# Allegro board pow.brd
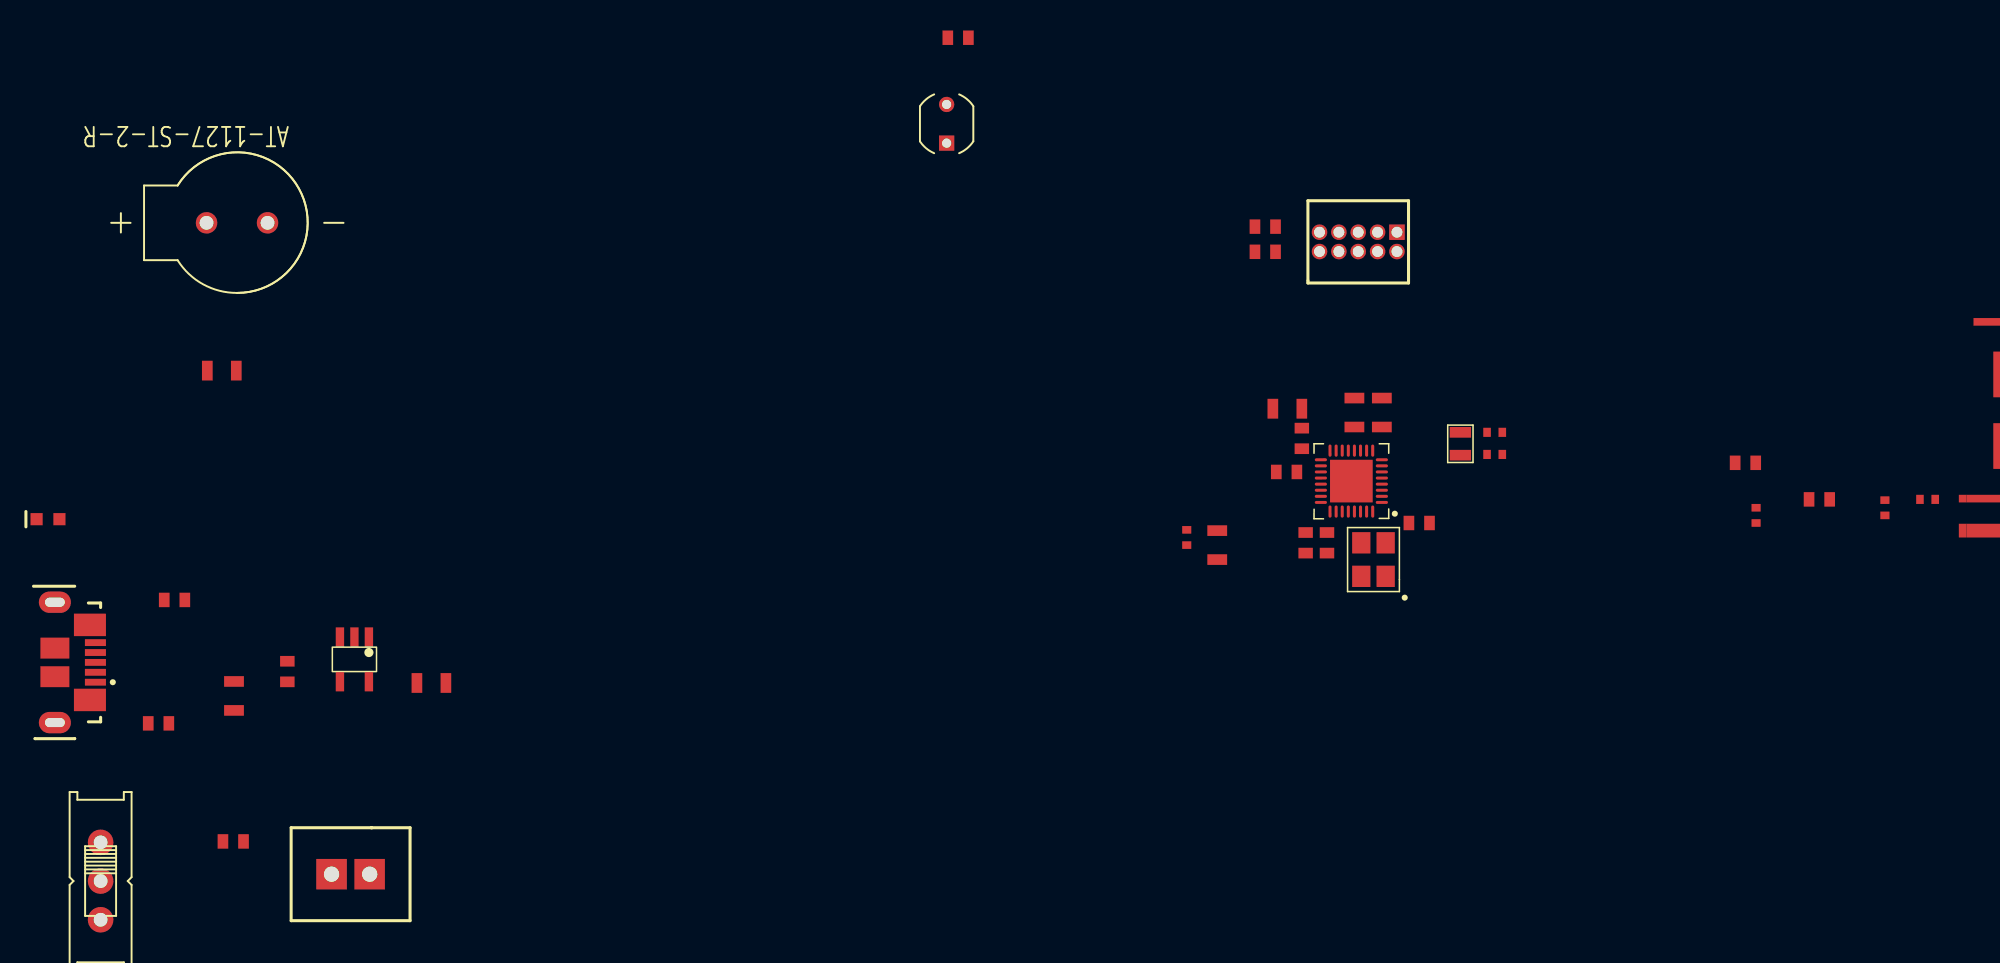
[diagram p0: board, top side]
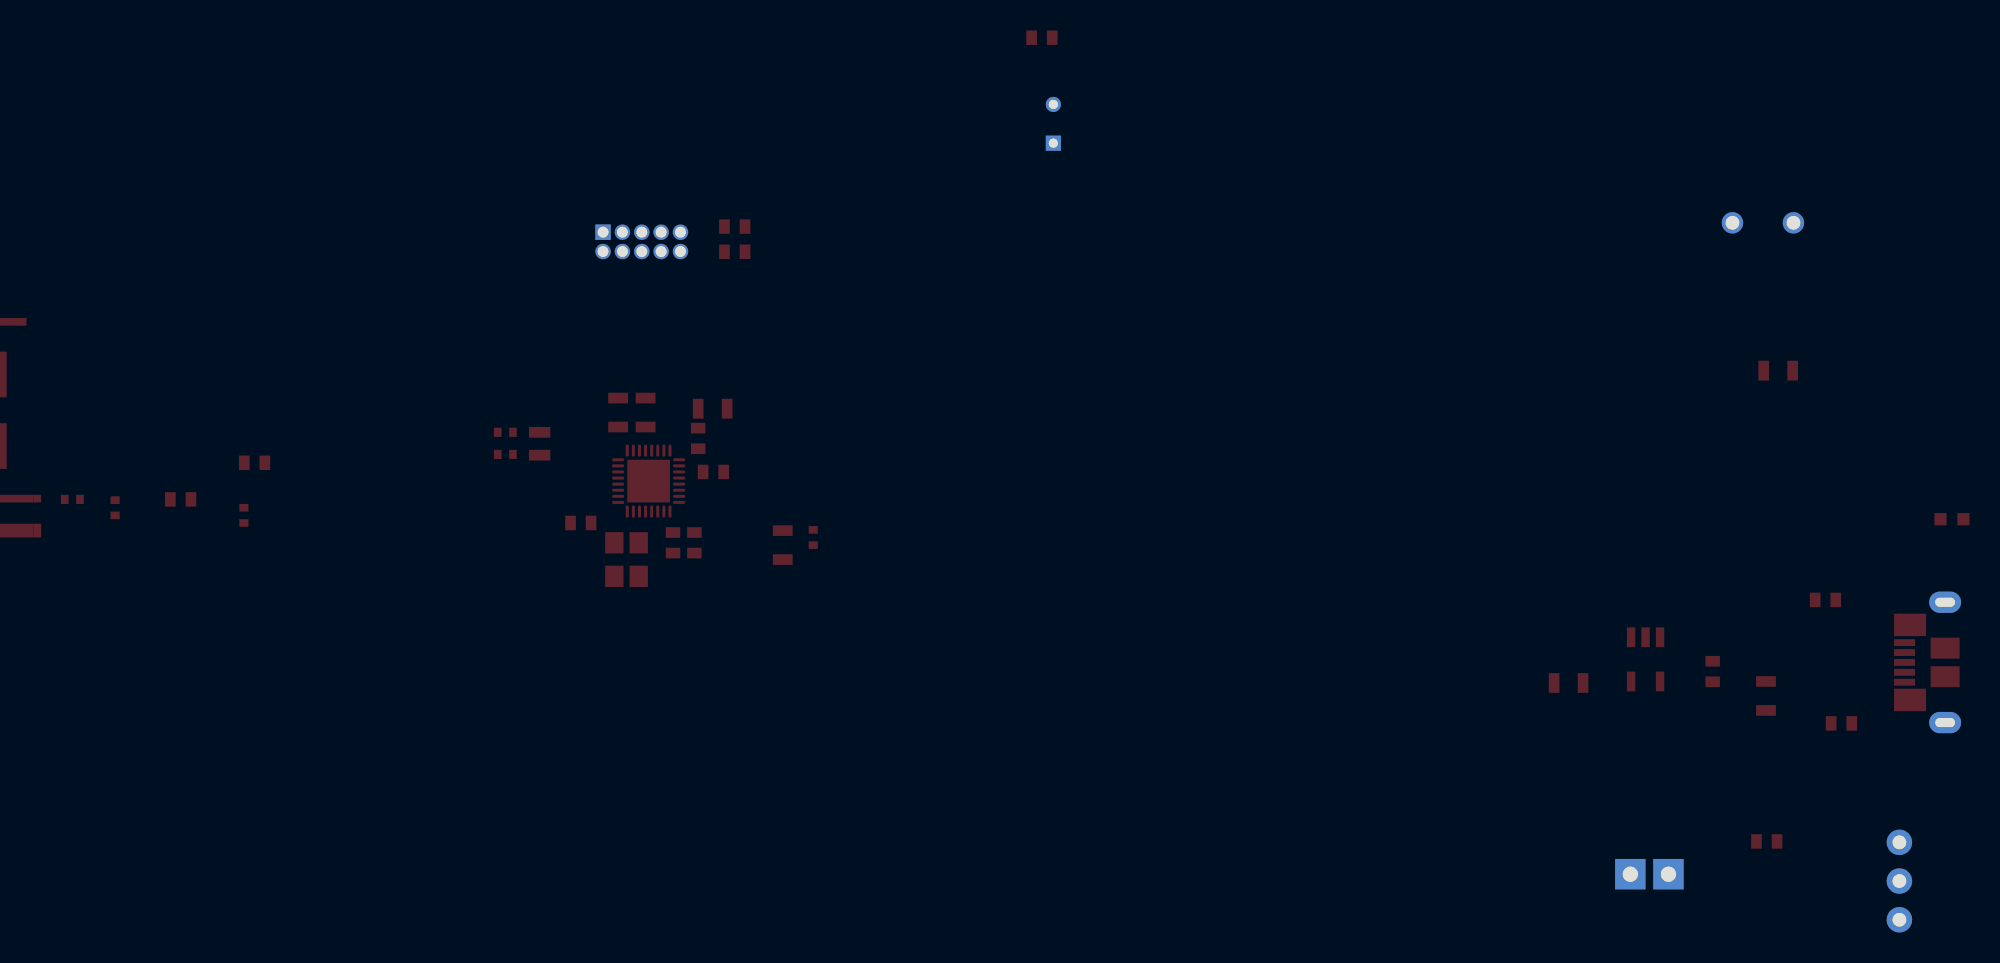
[diagram p1: board, bottom side, seen from below]

No outline. copper layers: TOP, BOTTOM. Coordinates in mm from the lowest, leftmost part position.

## Design rules (mm)
constraint set DEFAULT: min track width 0.127

## Placement (name value [footprint] x y rotation side)
A1  TI AN043  [AN043_PATCH_ANTENNA]  125.85 22.05 270 top
BUZ1  AT-1127-ST-2-R  [XDCR_AT-1127-ST-2-R]  12.4 43.2 180 top
C1  12p  [0402_C]  94.9 28 0 top
C2  12p  [0402_C]  94.9 29.45 0 top
C3  1uF  [0805_C]  85.7 30.75 270 top
C4  100uF  [0805_C]  87.5 30.75 90 top
C5  100nF  [0603_C]  81.25 26.85 180 top
C6  100nF  [0603_C]  82.5 22.2 270 top
C7  10uF  [0805_C]  76.7 22.05 270 top
C8  10uF  [0805_C]  81.3 31 180 top
C9  100nF  [0603_C]  83.9 22.2 270 top
C10  100nF  [0603_C]  89.95 23.5 0 top
C11  12pF  [0402_C]  123.3 25.05 0 top
C12  1.2pF  [0402_C]  112.05 24 270 top
C13  1.2pF  [0402_C]  120.5 24.5 270 top
C14  10uF  [0805_C]  11.4 33.5 180 top
C15  100nF  [0603_C]  79.85 41.3 180 top
C19  1uF  [0805_C]  25.15 13 0 top
C21  1uF  [0805_C]  12.2 12.15 270 top
CHC1  MAXIM MAX1555  [SMD_MAX1555]  20.1 14.55 180 top
CON1  JST B2B-XH-A LF SN  [B2B-XH-A]  19.85 0.45 0 top
CYS1  24MHz  [TSX-3225_XTAL]  86.95 21.1 90 top
CYS2  32.768MHz  [SC-20S_XTAL]  92.65 28.7 90 top
J1  SAMTEC FTSH-105-01-L-D-K  [SAMTEC_FTSH-105-01-L-D-K]  85.95 41.95 180 top
L1  10uH  [0603_L]  82.25 29.05 90 top
L2  FerriteBead  [0402_L]  74.7 22.55 90 top
L3  15nH  [0603_L]  111.35 27.45 0 top
L4  2nH  [0603_L]  116.2 25.05 0 top
LED1  GEN  [0603_LED]  0 23.75 0 top
LS1  PDV-P8001  [XDCR_PDV-P9003-1]  58.95 49.7 90 top
M1  TI CC2640R2F RSM  [CC2640R2FRSM]  85.5 26.25 90 top
R1  2K  [0603_R]  59.7 55.35 0 top
R2  100K  [0603_R]  79.85 42.95 0 top
R3  33K  [0603_R]  12.15 2.6 0 top
R4  33K  [0603_R]  8.3 18.45 180 top
R8  200  [0603_R]  15.7 13.75 90 top
R9  33K  [0603_R]  7.25 10.35 0 top
SW1  SIS  [EG1218]  3.45 0 270 top
USB1  MOLEX 1051640001  [MOLEX_105164-0001]  2 14.35 270 top

## Library data of the parts
A1 = ANTENNA
BUZ1 = AT-1127-ST-2-R
C1-C15 C19 C21 = CAP
CHC1 = MAX1555
CON1 = JST B2B-XH-A LF SN
CYS1 = CRYSTAL_24M
CYS2 = CRYSTAL_32768
J1 = SAMTEC FTSH-105-01-L-D-K
L1 L3 L4 = IND
L2 = FerriteBead
LED1 = LED
LS1 = PDV-P8001
M1 = CC2640
R1-R4 R8 R9 = RES
SW1 = SIS
USB1 = MOLEX 1051640001

## Footprints (pads in the part's own frame, mm; a bottom-side part is the same pattern mirrored in y, then rotated)
0402_C
  rect 0.5x0.6 smd: 1(-0.5,0) 2(0.5,0)
0402_L
  rect 0.5x0.6 smd: 1(-0.5,0) 2(0.5,0)
0603_C
  rect 0.7x0.95 smd: 1(-0.675,0) 2(0.675,0)
0603_L
  rect 0.7x0.95 smd: 1(-0.675,0) 2(0.675,0)
0603_LED
  rect 0.8x0.8 smd: 1(-0.75,0) 2(0.75,0)
0603_R
  rect 0.7x0.95 smd: 1(-0.675,0) 2(0.675,0)
0805_C
  rect 0.7x1.3 smd: 1(-0.95,0) 2(0.95,0)
AN043_PATCH_ANTENNA
  rect 0.9x0.5 smd: 1(-0.95,-0.25)
  rect 0.5x0.5 smd: 2(-3.05,-0.25)
B2B-XH-A
  rect 2x2 hole 1: 1(-1.25,0) 2(1.25,0)
CC2640R2FRSM
  rrect 0.2x0.8 smd: 1(-1.4,-2) 2(-1,-2) 3(-0.6,-2) 4(-0.2,-2) 5(0.2,-2) 6(0.6,-2) 7(1,-2) 8(1.4,-2) 24(-1.4,2)
  rrect 0.8x0.2 smd: 9(2,-1.4) 10(2,-1) 11(2,-0.6) 12(2,-0.2) 13(2,0.2) 14(2,0.6) 15(2,1) 16(2,1.4) 25(-2,1.4) 26(-2,1) 27(-2,0.6) 28(-2,0.2) 29(-2,-0.2) 30(-2,-0.6) 31(-2,-1) 32(-2,-1.4)
  rrect 0.2x0.8 smd rot 0.2: 17(1.4,2) 18(1,2) 19(0.6,2) 20(0.2,2) 21(-0.2,2) 22(-0.6,2) 23(-1,2)
  rect 2.8x2.8 smd: 33(0,0)
EG1218
  round 1.676 hole 0.9: O(-2.54,0) P(0,0) S(2.54,0)
MOLEX_105164-0001
  rect 0.45x1.38 smd: 1(1.3,1.11) 2(0.65,1.11) 3(0,1.11) 4(-0.65,1.11) 5(-1.3,1.11)
  rect 1.375x1.9 smd: P1(-0.938,-1.55) P2(0.938,-1.55)
  rect 1.475x2.1 smd: P3(-2.462,0.75) P4(2.462,0.75)
  oval 1.4x2.1 hole 0.6x1.3: S1(-3.95,-1.55) S2(3.95,-1.55)
SAMTEC_FTSH-105-01-L-D-K
  rect 1.016x1.016 hole 0.711: 1(-2.54,-0.635)
  round 1.016 hole 0.711: 2(-2.54,0.635) 3(-1.27,-0.635) 4(-1.27,0.635) 5(0,-0.635) 6(0,0.635) 7(1.27,-0.635) 8(1.27,0.635) 9(2.54,-0.635) 10(2.54,0.635)
SC-20S_XTAL
  rect 0.7x1.4 smd: 1(-0.75,0) 2(0.75,0)
SMD_MAX1555
  rect 0.55x1.3 smd: 1(-0.95,-1.45) 2(0,-1.45) 3(0.95,-1.45) 4(0.95,1.45) 5(-0.95,1.45)
TSX-3225_XTAL
  rect 1.4x1.2 smd: 1(-1.1,-0.8) 2(1.1,-0.8) 3(1.1,0.8) 4(-1.1,0.8)
XDCR_AT-1127-ST-2-R
  round 1.408 hole 0.9: N(-2,0) P(2,0)
XDCR_PDV-P9003-1
  rect 1x1 hole 0.6: 1(-1.27,0)
  round 1 hole 0.6: 2(1.27,0)

## Nets
GND: A1.1(-) BUZ1.N C1.2(B) C2.2(B) C3.1 C4.2(B) C5.2(B) C6.2(B) C7.2(B) C8.2(B) C9.2(B) C10.2(B) C12.2(B) C13.2(B) C15.2(B) C19.2(B) C21.2(B) CHC1.2 CON1.1 CYS1.2 CYS1.4 J1.3 J1.5 J1.9 M1.3 M1.7 M1.17 M1.20 M1.29 M1.33 R1.2(B) R3.2(B) R4.1 R9.2(B) USB1.5
GND_PS: LS1.2 R1.1
VCC: J1.1 L2.1
VDDR: C8.1 C9.1 C10.1 L1.2(B) M1.28 M1.32
VDDS: C4.1 C5.1 C6.1 C7.1 L2.2(B) M1.11 M1.19 M1.27 R2.1
ALRTN: M1.24
ANTENNA: A1.2 C11.2(B)
BAT+: C19.1 CHC1.5 CON1.2 SW1.P
BUZ: C14.1 M1.10
BUZ_IN: BUZ1.P C14.2(B)
CHG: CHC1.3 LED1.1(-)
DC: C21.1 CHC1.4 R8.1 USB1.1
DCDC_IN: SW1.S
DCDC_SW: L1.1 M1.18
FILTER: C11.1 C13.1 L4.2(B)
LED: LED1.2 M1.8 R8.2(B)
PS: LS1.1(PS) M1.9
RESET: C15.1 J1.10 M1.21 R2.2(B)
RF_N: L3.1 M1.2
RF_P: C12.1 L3.2(B) L4.1 M1.1
SCL: M1.26
SDA: M1.25
SW_O: R3.1 SW1.O
TCKC: J1.4 M1.14
TDI: J1.8 M1.15
TDO: J1.6 M1.16
TMSC: J1.2 M1.13
X24M_N: CYS1.3 M1.30
X24M_P: CYS1.1 M1.31
X32K_Q1: C1.1 CYS2.1 M1.5
X32K_Q2: C2.1 CYS2.2(B) M1.6(X32K_Q2)
N172030: C3.2(B) M1.12
N183563: R4.2(B) USB1.S1
N183606: R9.1 USB1.S2(SHIELD2)

Pads without a net: CHC1 1; J1 7; M1 4 22 23; USB1 2 3 4 P1 P2 P3 P4

## Copper pours and planes (outline as drawn; the poured copper is in the pictures)
Net_1 on TOP (solid shape): 130.75,34.25 128.11,34.25 128.11,32.25 130.75,32.25 130.75,29.55 128.11,29.55 128.11,27.55 130.75,27.55 130.75,22.55 125.85,22.55 125.85,23.45 130.25,23.45 130.25,24.85 125.85,24.85 125.85,25.35 130.25,25.35 130.25,27.05 127.61,27.05 127.61,30.05 130.25,30.05 130.25,31.75 127.61,31.75 127.61,34.75 130.25,34.75 130.25,36.45 126.31,36.45 126.31,36.95 130.75,36.95
